# Altium PCB 260115710xxxx-HW-2.0.PcbDoc
Units mm, origin at the board's own origin, x right, y up, seen from the top; angles counter-clockwise.
Board outline 80 x 22.86 mm, 2 copper layers (Top Layer, Bottom Layer), stack 1.57 mm thick; 22 components, 36 nets, 93 pads, 73 vias.
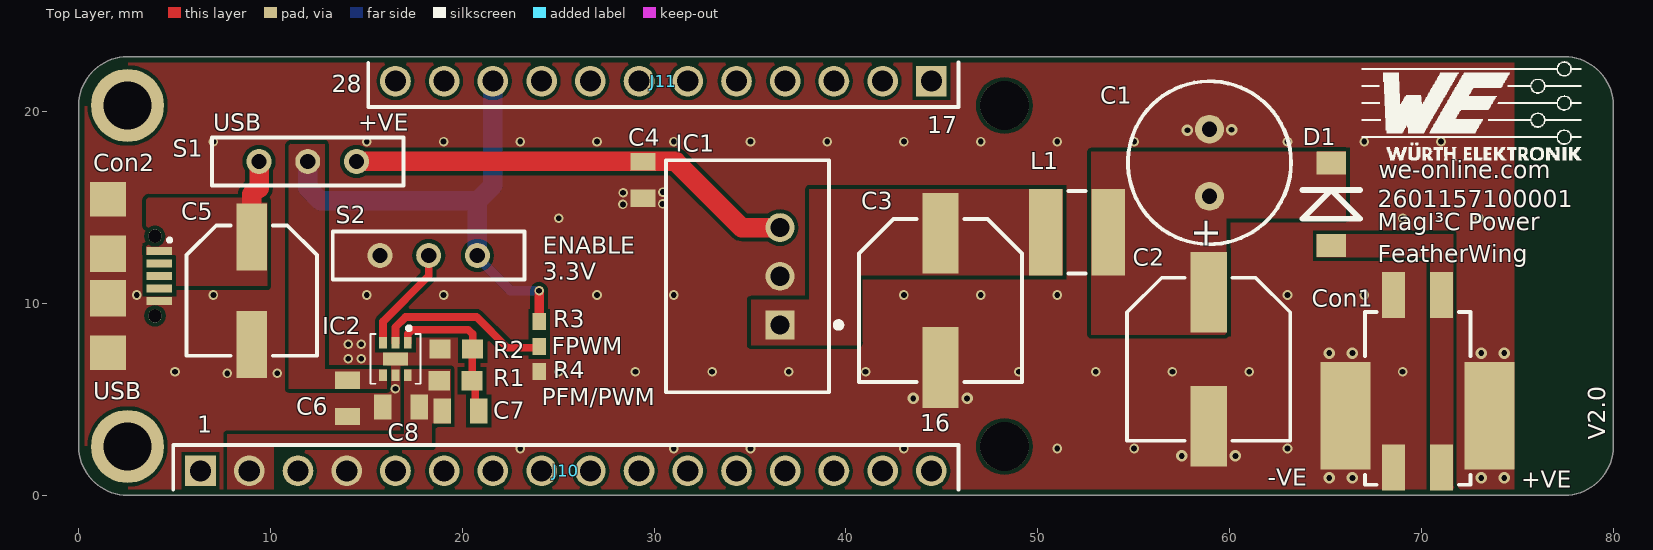
[diagram p0: Top Layer view]
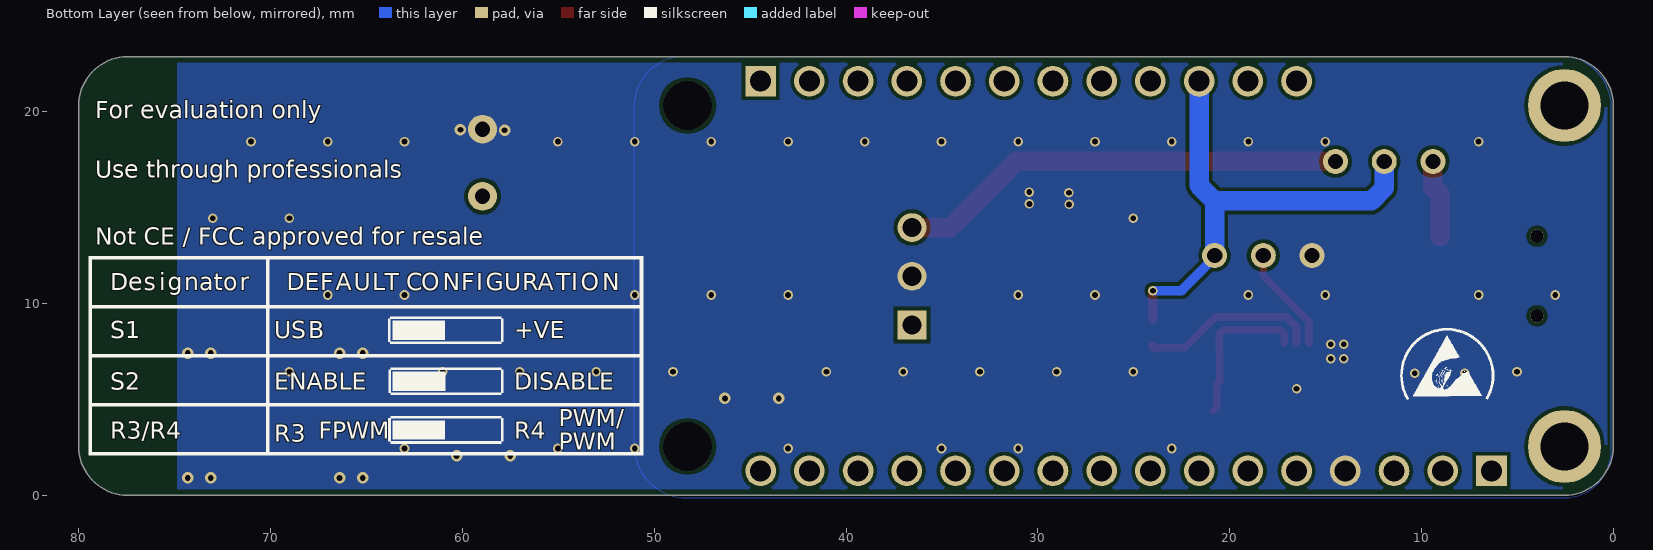
[diagram p1: Bottom Layer view, seen from below]
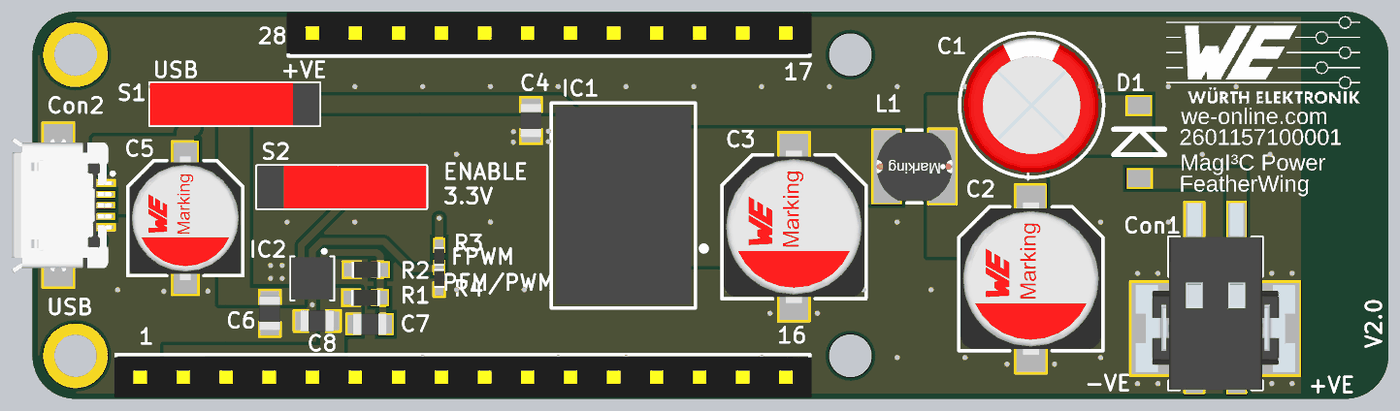
[diagram p2: 3D render of the assembled board from above, using the file's embedded part models]

## Layer stack, top to bottom
Top Solder: solder mask 0.0102, Solder Resist, Dk 3.5
Top Layer: signal copper 0.035
Dielectric 1: dielectric 1.5, FR-4, Dk 4.8
Bottom Layer: signal copper 0.035
Bottom Solder: solder mask 0.0102, Solder Resist, Dk 3.5

## Board outline
2.54,0 cw(c2.54,2.54) 0,2.54 0,20.32 cw(c2.54,20.32) 2.54,22.86 77.46,22.86 cw(c77.46,20.32) 80,20.32 80,2.54 cw(c77.46,2.54) 77.46,0

## Design rules (kind name [scope] priority, off if disabled: settings)
BoardOutlineClearance Exception_J1 [HasFootprint('691502710002')] p1: gap=0 ignorepadtopadclearanceinfootprint=FALSE
BoardOutlineClearance [All] p2: gap=0.3 ignorepadtopadclearanceinfootprint=FALSE
Clearance [All] p1: gap=0.2 ignorepadtopadclearanceinfootprint=FALSE
ComponentClearance [All] p1: gap=0 collisioncheckmode=3 verticalgap=0 showdistances=FALSE
HoleSize [All] p1: absolutevalues=TRUE maxlimit=5 minlimit=0.2 maxpercent=80.000 minpercent=20.000
MinimumAnnularRing [All] p1: minimumring=0.1
MinimumSolderMaskSliver [All] p1: minsoldermaskwidth=0.1
PasteMaskExpansion [All] p1: expansion=-0.1
PolygonConnect [All] p1: connectstyle=Direct reliefconductorwidth=0.254 reliefentries=4 polygonreliefangle="90 Angle" airgapwidth=0.254
RoutingVias [All] p1: holewidth=0.3 width=0.5 viastyle="Through Hole" minholewidth=0.3 minwidth=0.5 maxholewidth=2 maxwidth=2.5
SilkToSilkClearance [All] p1: silktosilkclearance=0.01
SilkToSolderMaskClearance [IsPad] p1: minsilkscreentomaskgap=0.1 clearancetoexposedcopper=TRUE
SolderMaskExpansion [All] p1: expansion=0.051
Width [All] p1: maxlimit=2 minlimit=0.254 preferedwidth=0.254
24 further rules are at their usual default settings.

## Components (designator, comment, footprint, x,y, rotation, side; value= is the part's Value field where it differs from the comment)
C1 "100uF, 50V" WCAP-ATG8_8x11.5 58.951,17.335 r270 top
C2 "10uF, 63V" WCAP-PSHP_8x8.7mm 58.908,7.087 r90 top
C3 "10uF, 63V" WCAP-PSHP_8x8.7mm 44.927,10.158 r90 top
C4 "22uF, 10V" WCAP-CSGP_0805_H=1.25mm 29.414,16.432 r270 top
C5 "220uF, 10V" WCAP-PSLP_6.3x5.8 9.017,10.668 r90 top
C6 "4.7uF, 25V" WCAP-CSGP_0805_H=1.25mm 14,5.05 r270 top
C7 "22pF, 10V" WCAP-CSGP_0805_H=0.6mm_Reflow 19.9,4.4 r180 top
C8 "10uF, 16V" WCAP-CSGP_0805_H=1.25mm 16.8,4.6 r180 top
Con1 "691805010302" 691805010302 69.8,5.048 r0 top
Con2 "WE-Communication Connectors" 629105136821 1.524,10.28 r270 top
D1 "STPS2L30" "SMA Flat" 65.295,15.169 r90 top
IC1 "8-42Vin, 5Vout, 1Aout" 173010x35 34.859,11.416 r90 top
IC2 "2.5-5.5Vin, 1.2Aout" 171010550 16.51,7.112 r270 top
J10 "61301611121" 61301611121 25.4,1.27 r0 top
J11 "61301211121" 61301211121 30.48,21.59 r180 top
L1 "1 uH, 4 A" WE-PD2_4532 52.039,13.714 r270 top
R1 "100k" "SMD Resistor 0603 IPC" 19.646,5.969 r180 top value=100K
R2 "32K4" "SMD Resistor 0603 IPC" 19.685,7.62 r0 top
R3 "0R" "SMD Resistor 0402 IPC" 24,8.408 r270 top
R4 "0R n.p." "SMD Resistor 0402 IPC" 24,7.106 r90 top
S1 "450301014042" 450301014042 11.938,17.4 r0 top
S2 "450301014042" 450301014042 18.243,12.5 r180 top

## Footprints (in the part's own frame and the unit in brackets; to place one, negate y for a bottom-side part, rotate by r counter-clockwise, add the part's x,y. Pads: shape width x height; smd on the part's side, far side on the other; paste and mask are expansions set on the pad)
173010x35 [mm] "Fixed Step Down Regulator Module, SIP-3, body 11.6x8mm"
  rect 1.5x1.5 hole 1: 1(-2.54,-1.7)
  round 1.5 hole 1: 2(0,-1.7) 3(2.54,-1.7)
  silkscreen extent -6.05,-4.9 6.05,4.25, body extent -5.8,-4 5.8,4, height 10.45
171010550 [mm] "Variable Step Down MicroModule, body 2.5x2.5mm"
  rect 0.6x0.4 smd: 1(-0.85,0.65) 2(-0.85,0) 3(-0.85,-0.65) 4(0.85,-0.65) 5(0.85,0) 6(0.85,0.65)
  rect 0.68x1.3 smd: EP(0,0)
  silkscreen extent -1.7,-1.3 1.3,1.3, body extent -1.25,-1.25 1.25,1.25, height 1.21
61301211121 [mm] "Pin Header, pitch 2.54 mm, THT, Vertical, single row, 12p"
  rect 1.6x1.6 hole 1.1: 1(-13.97,0)
  round 1.6 hole 1.1: 2(-11.43,0) 3(-8.89,0) 4(-6.35,0) 5(-3.81,0) 6(-1.27,0) 7(1.27,0) 8(3.81,0) 9(6.35,0) 10(8.89,0) 11(11.43,0) 12(13.97,0)
  silkscreen extent -15.39,-0.96 15.39,1.35, body extent -15.49,-1.21 15.49,1.21, height 8.51
61301611121 [mm] "Pin Header, pitch 2.54 mm, THT, Vertical, single row, 16p"
  rect 1.6x1.6 hole 1.1: 1(-19.05,0)
  round 1.6 hole 1.1: 2(-16.51,0) 3(-13.97,0) 4(-11.43,0) 5(-8.89,0) 6(-6.35,0) 7(-3.81,0) 8(-1.27,0) 9(1.27,0) 10(3.81,0) 11(6.35,0) 12(8.89,0) 13(11.43,0) 14(13.97,0) 15(16.51,0) 16(19.05,0)
  silkscreen extent -20.47,-0.97 20.47,1.35, body extent -20.57,-1.21 20.57,1.21, height 8.51
450301014042 [mm] "THT Mini Slide Switch, body 10x2.5mm"
  round 1.3 hole 0.8: 1(0,0) 2(-2.54,0) 3(2.54,0)
  silkscreen extent -5,-1.25 5,1.25, body extent -5,-1.25 5,1.25, height 6.43
629105136821 [mm] "5 pins"
  rect 0.4x1.35 smd paste-0.1: 1(-2.45,2.675)
  rect 0.4x1.35 smd: 2(-1.8,2.675) 3(-1.15,2.675) 4(-0.5,2.675) 5(0.15,2.675)
  rect 1.8x1.9 smd: Z1(-5.15,0) Z4(2.85,0)
  rect 1.9x1.9 smd: Z2(-2.3,0) Z3(0,0)
  round 0.7 hole 0.7 unplated: ""(-3.225,2.45) ""(0.925,2.45)
  silkscreen extent -3.08,3.16 -2.96,3.27, body extent -5.15,-2.76 2.85,3.15, height 2.69
691805010302 [mm] "2.50mm Screwless SMT, 2p"
  rect 1.2x2.4 smd: 1(-1.25,-3.6) 1(-1.25,5.4) 2(1.25,-3.6) 2(1.25,5.4)
  rect 2.6x5.6 smd: M1(-3.75,-0.9) M2(3.75,-0.9)
  silkscreen extent -2.75,-4.5 2.75,4.5, body extent -4.7,-4.5 4.7,6.5, height 5.1
"SMA Flat" [mm]
  rect 1.2x1.52 smd: 1(-2.16,0) 2(2.16,0)
  silkscreen extent -0.75,-1.5 0.75,1.5, body extent -2.5,-1.5 2.5,1.5, height 1.1
"SMD Resistor 0402 IPC" [mm] "IPC 782 Resistor Footprint 0402"
  rect 0.9x0.7 smd: 1(-0.65,0) 2(0.65,0)
  body extent -0.55,-0.3 0.55,0.3, height 0.4
"SMD Resistor 0603 IPC" [mm] "IPC 782 Resistor Footprint 0603"
  rect 1.1x1 smd: 1(-0.85,0) 2(0.85,0)
  body extent -0.85,-0.48 0.85,0.48, height 0.6
WCAP-ATG8_8x11.5 [mm] "Aluminum Electrolytic Capacitors, 8x11.5mm"
  round 1.5 hole 0.8: 1(-1.75,0) 2(1.75,0)
  silkscreen extent -4.25,-4.25 4.25,4.25, body extent -3.99,-4 4,4, height 11.81
WCAP-CSGP_0805_H=0.6mm_Reflow [mm] "Ceramic Capacitors, body 2x1.25mm"
  rect 0.9x1.3 smd: 1(-0.95,0) 2(0.95,0)
  body extent -1,-0.62 1,0.63, height 0.6
WCAP-CSGP_0805_H=1.25mm [mm] "Ceramic Capacitors, body 2x1.25mm"
  rect 0.9x1.3 smd: 1(-0.95,0) 2(0.95,0)
  body extent -1,-0.62 1,0.63, height 1.25
WCAP-PSHP_8x8.7mm [mm] "Aluminium Polymer V-Chip SMT Capacitors, D8mm x L8.7mm"
  rect 4.2x1.9 smd: 1(-3.5,0) 2(3.5,0)
  silkscreen extent -4.25,-4.25 4.25,4.25, body extent -4.5,-4.15 4.5,4.15, height 8.7
WCAP-PSLP_6.3x5.8 [mm] "Aluminum Polymer Capacitors, body diameter 6.3mm"
  rect 3.5x1.6 smd: 1(-2.8,0) 2(2.8,0)
  silkscreen extent -3.4,-3.4 3.4,3.4, body extent -3.65,-3.3 3.65,3.3, height 5.8
WE-PD2_4532 [mm] "SMD Power Inductor, 2-Leads, body 4x4.5mm"
  rect 4.5x1.75 smd: 1(0,1.625) 2(0,-1.625)
  silkscreen extent -2.15,-0.45 2.15,0.45, body extent -2,-2.25 2,2.25, height 3.2

## Part data
C1: library part 860010674014, "WCAP-ATG8 THT Aluminum Electrolytic Capacitors, D8mm x L11.5mm, 100uF, +/-20%, 50VDC", Capacitance=100uF, Capacitance Tolerance=+/-20%, Leakage Current=50uA, Operating Temperature="-40 to +85degC", Rated Voltage=50VDC, Ripple Current max.=286mA, ComponentLink1Description=Manufacturer, ComponentLink1URL=http://www.we-online.de, ComponentLink2Description=Datasheet, ComponentLink2URL=https://katalog.we-online.com/pbs/datasheet/860010674014.pdf, Diameter=8mm, Dissipation Factor=10%, Endurance=2000h, Length=11.5mm, Mounting Technology=THT, Packaging="Ammo Pack", Part Number=860010674014, Published Date="August 2019", Publisher="Wurth Elektronik", Technical Reference=ATBE115101M050DSPA7B000
C2 C3: library part 875115852001, "WCAP-PSHP Aluminum Polymer Capacitors, size 8x8.7mm, 10uF, +/-20%, 63VDC", Capacitance=10uF, Capacitance Tolerance=+/-20%, Leakage Current=126uA, Operating Temperature="-55 to +105degC", Rated Voltage=63VDC, Ripple Current=1.5A, ComponentLink1Description=Manufacturer, ComponentLink1URL=http://www.we-online.de, ComponentLink2Description=Datasheet, ComponentLink2URL=https://katalog.we-online.com/pbs/datasheet/875115852001.pdf, Diameter=8mm, Dissipation Factor=12%, ESR=45mOhm, Height=8.7mm, Mounting Technology=SMD, Packaging="Tape and Reel", Part Number=875115852001, Published Date="August 2019", Publisher="Wurth Elektronik", Size=8x8.7mm, Technical Reference=PSEE087100M063DVCTEB000
C4: library part 885012107011, "WCAP-CSGP General Purpose Ceramic Capacitors, size 0805, 22uF, +/-20%, 10VDC", Capacitance=22uF, Capacitance Tolerance=+/-20%, Isolation Resistance=>=0.005GOhm, Operating Temperature="-55 to +85degC", Rated Voltage=10VDC, Ceramic Type=X5R, ComponentLink1Description=Manufacturer, ComponentLink1URL=http://www.we-online.de, ComponentLink2Description=Datasheet, ComponentLink2URL=https://katalog.we-online.com/pbs/datasheet/885012107011.pdf, Dissipation Factor=#NAME?, Height="1.25mm +0.20/-0.00mm", Mounting Technology=SMT, Packaging="Tape and Reel", Part Number=885012107011, Published Date="August 2019", Publisher="Wurth Elektronik", Size=0805, Technical Reference=X5R0805226M010DFCT10000
C5: library part 875105244013, "WCAP-PSLP Aluminum Polymer Capacitors, D6.3mm, L5.8mm, 220uF, +/-20%, 10VDC", Capacitance=220uF, Capacitance Tolerance=+/-20%, Leakage Current=300uA, Operating Temperature="-55 to +105degC", Rated Voltage=10VDC, Ripple Current max.=1970mA, ComponentLink1Description=Manufacturer, ComponentLink1URL=http://www.we-online.de, ComponentLink2Description=Datasheet, ComponentLink2URL=https://katalog.we-online.com/pbs/datasheet/875105244013.pdf, Diameter=6.3mm, Dissipation Factor=8%, Endurance=2000h, ESR=30mOhm, Length=5.8mm, Mounting Technology=SMD, Packaging="Tape and Reel", Part Number=875105244013, Published Date="August 2019", Publisher="Wurth Elektronik", Technical Reference=PSED058221M010DVCTBB000
C6: library part 885012107018, "WCAP-CSGP General Purpose Ceramic Capacitors, size 0805, 4.7uF, +/-20%, 25VDC", Capacitance=4.7uF, Capacitance Tolerance=+/-20%, Isolation Resistance=>=0.02GOhm, Operating Temperature="-55 to +85degC", Rated Voltage=25VDC, Ceramic Type=X5R, ComponentLink1Description=Manufacturer, ComponentLink1URL=http://www.we-online.de, ComponentLink2Description=Datasheet, ComponentLink2URL=https://katalog.we-online.com/pbs/datasheet/885012107018.pdf, Dissipation Factor=#NAME?, Height="1.25mm +/-0.20mm", Mounting Technology=SMT, Packaging="Tape and Reel", Part Number=885012107018, Published Date="August 2019", Publisher="Wurth Elektronik", Size=0805, Technical Reference=X5R0805475M025DFCT10000
C7: library part 885012007002, "WCAP-CSGP General Purpose Ceramic Capacitors, size 0805, 22pF, +/-5%, 10VDC", Capacitance=22pF, Capacitance Tolerance=+/-5%, Isolation Resistance=>=10GOhm, Operating Temperature="-55 to +125degC", Rated Voltage=10VDC, Ceramic Type=NP0, ComponentLink1Description=Manufacturer, ComponentLink1URL=http://www.we-online.de, ComponentLink2Description=Datasheet, ComponentLink2URL=https://katalog.we-online.com/pbs/datasheet/885012007002.pdf, Dissipation Factor=Q>=400+20C, Height="0.6mm +/-0.10mm", Mounting Technology=SMT, Packaging="Tape and Reel", Part Number=885012007002, Published Date="August 2019", Publisher="Wurth Elektronik", Size=0805, Technical Reference=NP00805220J010DFCT10000
C8: library part 885012107014, "WCAP-CSGP General Purpose Ceramic Capacitors, size 0805, 10uF, +/-20%, 16VDC", Capacitance=10uF, Capacitance Tolerance=+/-20%, Isolation Resistance=>=0.005GOhm, Operating Temperature="-55 to +85degC", Rated Voltage=16VDC, Ceramic Type=X5R, ComponentLink1Description=Manufacturer, ComponentLink1URL=http://www.we-online.de, ComponentLink2Description=Datasheet, ComponentLink2URL=https://katalog.we-online.com/pbs/datasheet/885012107014.pdf, Dissipation Factor=#NAME?, Height="1.25mm +/-0.20mm", Mounting Technology=SMT, Packaging="Tape and Reel", Part Number=885012107014, Published Date="August 2019", Publisher="Wurth Elektronik", Size=0805, Technical Reference=X5R0805106M016DFCT10000
Con1: "WR-TBL Serie 8050 Horizontal Entry SMT, Screwless, pitch 2.5mm, 2p", Operating Temperature="-45 to +130degC", Rated Current [UL]=6A, Working Voltage [UL]=300VAC, Application=Screwless, Compliance="Lead free / RoHS", ComponentLink1Description=Manufacturer, ComponentLink1URL=http://www.we-online.de, ComponentLink2Description=Datasheet, ComponentLink2URL=https://katalog.we-online.de/em/datasheet/691805010302.pdf, Modularity=No, Mounting Technology=SMT, Packaging="Tape and Reel", Part Number=691805010302, PCB/Cable/Panel=PCB, Pin Number=2, Pitch=2.5mm, Published Date="October 2019", Publisher="Wurth Elektronik", Type=Horizontal
Con2: library part "WE-Communication Connectors 629105136821", "WR-COM Micro USB SMT Type B", Manufacturer="Würth Elektronik eiSos GmbH", Part Number=629105136821, ComponentLink1 Description=Manufacturer, ComponentLink1URL=http://www.we-online.de, ComponentLink2 Description=Datasheet, ComponentLink2URL=http://katalog.we-online.de/em/datasheet/629105136821.pdf, Created by="Karrer Zheng", Created Date=10/10/2014, NoPins=5
D1: "Single chip Schottky rectifiers STPS2L30, size SMA Flat, If 1 A, Vrrm 30 V, Vf 0.325 V", Forward current="1 A", Forward voltage drop="0.325 V", Maximum operating junction temperature="+150 degC", Repetitive peak reverse voltage="30 V", Reverse leakage current="200 uA", Storage temperature range="-65 to +150 degC", Mounting Technology=SMT, Packaging="Tape and ree", Part Number=STPS2L30, Publisher=STMicroelectronics
IC1: library part 173010535, "MagI3C-FDSM Fixed Step Down Regulator Module, SIP-3, 8-36Vin, 5Vout, 1Aout", Input Voltage=8-42V, Operating Temperature="-40 to +85degC", Output Current=1A, Output Voltage=5V, Part Number=173010542, ComponentLink1Description=Manufacturer, ComponentLink1URL=http://www.we-online.de, ComponentLink2Description=Datasheet, ComponentLink2URL=https://www.we-online.com/catalog/datasheet/173010542.pdf, Height=10.5mm, Length=11.6mm, Mounting Technology=THT, Packaging=Tube, Published Date="March 2020", Publisher="Wurth Elektronik", Size=SIP-3, Width=8.5mm
IC2: library part 171010550, "MagI3C-VDMM Variable Step Down MicroModule, LGA-6EP, 2.5-5.5Vin, 1.2Aout", Input Voltage=2.5-5.5V, Operating Temperature="-40 to +125degC", Output Current=1.2A, Output Voltage=0.8-5.5V, ComponentLink1Description=Manufacturer, ComponentLink1URL=http://www.we-online.de, ComponentLink2Description=Datasheet, ComponentLink2URL=https://katalog.we-online.de/pm/datasheet/171010550.pdf, Height=1.2mm, Length=2.5mm, Mounting Technology=SMT, Packaging="Tape and Reel", Part Number=171010550, Published Date="October 2019", Publisher="Wurth Elektronik", Size=LGA-6EP, Width=2.5mm
J10: "THT Vertical Pin Header WR-PHD, Pitch 2.54 mm, Single Row, 16 pins", Contact Resistance="20 mOhm", Operating Temperature="-40 to 105 degC", Rated Current="3 A", Withstanding Voltage="500 VAC", Working Voltage="250 VAC", ComponentLink1Description=Manufacturer, ComponentLink1URL=http://www.we-online.de, ComponentLink2Description=Datasheet, ComponentLink2URL=https://katalog.we-online.de/em/datasheet/6130xx11121.pdf, Gender=Male, Mounting Technology=THT, Orientation=Vertical, Packaging=Bag, Part Number=61301611121, Pin Number=16, Pitch="2.54 mm", Published Date="August 2018", Publisher="Wurth Elektronik", Row Number=Single
J11: "THT Vertical Pin Header WR-PHD, Pitch 2.54 mm, Single Row, 12 pins", Contact Resistance="20 mOhm", Operating Temperature="-40 to 105 degC", Rated Current="3 A", Withstanding Voltage="500 VAC", Working Voltage="250 VAC", ComponentLink1Description=Manufacturer, ComponentLink1URL=http://www.we-online.de, ComponentLink2Description=Datasheet, ComponentLink2URL=https://katalog.we-online.de/em/datasheet/6130xx11121.pdf, Gender=Male, Mounting Technology=THT, Orientation=Vertical, Packaging=Bag, Part Number=61301211121, Pin Number=12, Pitch="2.54 mm", Published Date="August 2018", Publisher="Wurth Elektronik", Row Number=Single
L1: library part 7447730, "SMT Power Inductor WE-PD2, size 4532, 1 uH, 4 A", DC Resistance max.="0.049 Ohm", Inductance="1 uH", Operating Temperature="-40 to +125 degC", Rated Current="4 A", Saturation Current="5.72 A", Self Resonant Frequency="110 MHz", ComponentLink1Description=Manufacturer, ComponentLink1URL=http://www.we-online.de, ComponentLink2Description=Datasheet, ComponentLink2URL=https://katalog.we-online.com/pbs/datasheet/7447730.pdf, Mounting Technology=SMT, Packaging="Tape and Reel", Part Number=7447730, Published Date="December 2018", Publisher="Wurth Elektronik", Size=4532
R1: library part SMD_Resistor, "SMD Resistor /100k / 0603/ 1%", Package Description="Chip Resistor", Latest Revision Date=2018.10.31, Latest Revision Note=Created, Mounting Style=SMD, Published=2018.10.31, Publisher="Würth Elektronik"
R2: library part SMD_Resistor, "SMD Resistor / 32k4 / 0603 / 1%", Package Description="Chip Resistor", Latest Revision Date=2018.10.31, Latest Revision Note=Created, Mounting Style=SMD, Published=2018.10.31, Publisher="Würth Elektronik"
R3 R4: library part SMD_Resistor, "SMD Resistor / 0R / 0402 / 1%", Package Description="Chip Resistor", Latest Revision Date=2018.10.31, Latest Revision Note=Created, Mounting Style=SMD, Published=2018.10.31, Publisher="Würth Elektronik"
S1 S2: "WS-SLTV THT Mini Slide Switch, Opposite Side Connection, SPDT", Operating Temperature="-40 to +85degC", Rated Current=500mA, Rated Voltage=12VDC, Circuit=SPDT, ComponentLink1Description=Manufacturer, ComponentLink1URL=http://www.we-online.de, ComponentLink2Description=Datasheet, ComponentLink2URL=https://katalog.we-online.com/em/datasheet/450301014042.pdf, Contact Material="Copper Alloy", Contact Plating=Gold, Mounting Technology=THT, Packaging=Bulk, Part Number=450301014042, Published Date="September 2019", Publisher="Wurth Elektronik", Size=10x2.5mm, Switching Function=On-On, Terminal Material="Copper Alloy", Terminal Plating=Gold

## Free pads (board coordinates)
  round 3.81 / inner round 1.524 / far side round 3.81 hole 2.5: NC(2.54,2.54) NC(2.54,20.32)
  round 2.54 hole 2.54 unplated: NC(48.26,2.54) NC(48.26,20.32)

## Via types
v1: diameter 0.5, hole 0.3, Top Layer to Bottom Layer, tented both sides, 59 vias
v2: diameter 0.6, hole 0.3, Top Layer to Bottom Layer, tented both sides, 14 vias

## Nets (pads, with @x,y where several pads share a name; then routed paths per layer and width w, separated by ;. In a path a pad name is that pad's centre, name@x,y a point inside that pad or via, vN(x,y) a via of type N, cw(c..) or ccw(c..) an arc to the next point about the centre after c; other vN are vias at no path point)
+3V3: C7.2 C8.1 IC2.6 J10.2 R1.2
+24V: Con1.2 D1.1
/Reset: J10.1
AREF: J10.3
D1_OUT: C1.2 C2.2 D1.2 L1.1
EN: J11.11
EN_VDMM: IC2.3 S2.1 | length 5.5
  Top Layer w0.254: S2.1@18.243,12.443 S2.1
  Top Layer w0.4: IC2.3 15.86,9.055 18.243,11.438 S2.1@18.243,12.443
FB_VDMM: C7.1 IC2.1 R1.1 R2.2 | length 8.2
  Top Layer w0.4: IC2.1 17.16,8.402 17.394,8.636 20.301,8.636 20.535,8.402 R2.2 20.515,7.601 20.515,5.988 R1.1 20.673,5.792 20.673,4.577 C7.1
GND: C1.1 C2.1 C3.1 C4.2 C5.1 C6.2 C8.2 Con1.1 Con1.M1 Con1.M2 Con2.5 Con2.Z1 Con2.Z2 Con2.Z3 Con2.Z4 IC1.2 IC2.5 IC2.EP J10.4 R2.1 R4.1 S2.3
  other v1: 23.02,2.437 31.02,2.437 35.02,2.437 43.02,2.437 51.02,2.437 55.02,2.437 63.02,2.437 16.51,5.55 7.747,6.35 10.354,6.354 5.02,6.437 25.02,6.437 29.02,6.437 33.02,6.437 37.02,6.437 41.02,6.437 49.02,6.437 53.02,6.437 57.02,6.437 61.02,6.437 69.02,6.437 14.05,7.112 14.732,7.112 14.05,7.874 14.732,7.874 3.02,10.437 7.02,10.437 15.02,10.437 19.02,10.437 27.02,10.437 31.02,10.437 43.02,10.437 47.02,10.437 51.02,10.437 63.02,10.437 67.02,10.437 25.02,14.437 69.02,14.437 73.02,14.437 28.369,15.16 30.436,15.189 28.376,15.774 30.443,15.803 7.02,18.437 15.02,18.437 19.02,18.437 23.02,18.437 27.02,18.437 31.02,18.437 35.02,18.437 39.02,18.437 43.02,18.437 47.02,18.437 51.02,18.437 55.02,18.437 63.02,18.437 67.02,18.437 71.02,18.437
  other v2: 65.2,0.9 66.4,0.9 73.122,0.9 74.322,0.9 57.503,2.05 60.303,2.05 43.512,5.05 46.312,5.05 65.2,7.409 66.4,7.409 73.122,7.409 74.322,7.409 57.8,19.033 60.1,19.059
GPIO9: J11.5
GPIO10: J11.6
GPIO11: J11.7
GPIO12: J11.8
GPIO13: J11.9
GPIOA0: J10.5
GPIOA1: J10.6
GPIOA2: J10.7
GPIOA3: J10.8
GPIOA4: J10.9
GPIOA5: J10.10
I2C_SCL: J11.2
I2C_SDA: J11.1
MODE_VDMM: IC2.2 R3.2 R4.2 | length 9.2
  Top Layer w0.4: IC2.2 16.51,8.766 17.038,9.294 20.74,9.294 22.342,7.692 R3.2@23.936,7.692
  Top Layer w0.5: R3.2@23.936,7.692 R3.2
NC: J10.16
SPI_MISO: J10.13
SPI_MOSI: J10.12
SPI_SCK: J10.11
UART1_RX: J11.4
UART1_TX: J11.3
UART5_RX: J10.14
UART5_TX: J10.15
VBAT: J11.12
VCC: C5.2 Con2.1 S1.2 | length 5
  Top Layer w0.5: S1.2@9.319,17.321 S1.2
  Top Layer w1.016: C5.2@9.017,14.418 C5.2 9.015,13.47 9.015,15.696 9.319,16 ; 9.398,16 S1.2@9.398,17.321
VDD: C4.1 IC1.3 S1.3 | length 23.5
  Top Layer w1.016: S1.3 27.225,17.4 31.118,17.4 34.562,13.956 IC1.3
VIN_FDSM: C3.2 IC1.1 L1.2
VIN_VDMM: C6.1 IC2.4 J11.10 R3.1 S1.1 S2.2 | length 25.3
  Top Layer w0.5: R3.1@24,9.165 v1(24,10.665)
  Bottom Layer w0.5: S2.2@20.728,12.445 22.508,10.665 v1@23.841,10.665
  Bottom Layer w1.016: S1.1 11.938,16.019 12.608,15.349 20.783,15.349 ; S2.2 20.783,15.349 ; J11.10 21.59,16.156 20.783,15.349
pads on no net: Con2. Con2.2 Con2.3 Con2.4

## Polygon pours and split planes (outlines as drawn)
GND on Top Layer "Top Layer-GND" (solid, remove dead copper, pour order 52): -0.502,-0.006 74.85,-0.006 74.85,22.853 -0.037,22.853
VCC on Top Layer "Polygon_1_Net_VCC" (solid, remove dead copper, pour order 24): 3.524,15.507 8.599,15.497 8.594,15.238 9.817,15.238 9.817,10.909 5.067,10.909 5.067,12.53 3.524,12.53
D1_OUT on Top Layer "Top Layer-D1_OUT 1" (solid, pour order 50): 52.789,17.914 64.521,17.914 64.535,17.929 66.055,17.929 66.055,14.434 59.818,14.434 59.818,8.528 59.858,8.487 59.75,8.379 52.789,8.379 52.789,16.19
no net on Top Layer "Top Layer-No Net 4" (solid, pour order 48): 52.789,15.964
+24V on Top Layer "Top Layer-D1_OUT" (solid, pour order 12): 64.535,12.409 70.45,12.409 70.45,0.248 71.885,0.248 71.65,0.483 71.65,13.609 64.535,13.609
VIN_VDMM on Top Layer "Top Layer-VIN_VDMM" (solid, pour order 14): 16.06,5.55 10.96,5.55 10.96,18.315 12.822,18.311 12.822,6.818 12.822,6.688 12.822,6.562 16.06,6.562
no net on Top Layer "Top Layer-No Net 3" (solid, pour order 44): 71.858,16.19
+3V3 on Top Layer "Top Layer-+3V3" (solid, remove dead copper, pour order 6): 19.4,3.75 18.415,3.75 18.415,2.54 10.173,2.54 10.173,0.241 7.734,0.241 7.734,3.175 16.96,3.175 16.96,4.826 16.96,6.562 18.804,6.562 19.4,6.562
no net on Top Layer "Top Layer-No Net" (solid, pour order 40): 0,20.828
no net on Top Layer "Top Layer-No Net 1" (solid, pour order 38): 0,2.286
no net on Top Layer "Top Layer-No Net 2" (solid, pour order 36): 48.387,13.208
VIN_FDSM on Top Layer "Polygon_1_Net_N$1" (solid, remove dead copper, pour order 18): 40.651,11.464 40.651,7.961 40.782,7.83 35.051,7.83 35.051,9.733 35.051,10.193 38.092,10.193 38.092,15.964 51.289,15.964 51.289,11.464
GND on Bottom Layer "Bottom Layer-GND" (solid, pour order 31): 48.509,0.006 74.87,0.006 74.87,23.006 48.63,23.006 ccw(c48.502,20.41) 48.373,23.006 0.036,23.006 0.036,12.134 0.036,2.482 ccw(c2.526,2.482) 2.526,-0.007 48.246,-0.007 ccw(c48.246,2.736)
no net on Bottom Layer "Polygon_1_Net_GND" (solid, remove dead copper, pour order 26): 0.102,12.002 0.102,20.256 cw(c2.718,20.256) 2.718,22.873 48.438,22.873 cw(c48.438,20.257) 51.054,20.257 51.054,2.607 cw(c48.311,2.603) 48.311,-0.14 2.591,-0.14 cw(c2.591,2.349) 0.102,2.349

## Silkscreen, mask and mechanical layers (free items; w line width, h text height)
Top Overlay:
  drawing of 27 lines, arcs and shapes, not listed
  text "USB" at 7,19 h0.9
  text "+VE" at 14.565,19 h0.9
  text "we-online.com" at 67.768,16.225 h1.52
  text "2601157100001" at 67.713,14.707 h1.52
  text "MagI³C Power" at 67.713,13.495 h1.52
  text "FeatherWing" at 67.713,11.834 h1.52
  text "ENABLE / 3.3V" at 24.201,11.242 h0.9
  text "FPWM" at 24.65,7.363 h0.9
  text "USB" at 0.75,5 h0.9
  text "PFM/PWM" at 24.148,4.695 h0.9
  text "V2.0" at 79.574,2.905 h0.9 r90
  text "-VE" at 62,0.496 h0.9
  text "+VE" at 75.2,0.389 h0.9
Bottom Overlay:
  drawing of 89 lines, arcs and shapes, not listed
  text "For evaluation only" at 79.15,19.648 h0.9
  text "Use through professionals" at 79.15,16.548 h0.9
  text "Not CE / FCC approved for resale" at 79.15,13.057 h0.9
  text "N" at 52.716,10.694 h0.9
  text "O" at 53.834,10.694 h0.9
  text "I" at 54.313,10.694 h0.9
  text "T" at 55.112,10.694 h0.9
  text "A" at 56.07,10.694 h0.9
  text "R" at 56.869,10.694 h0.9
  text "U" at 57.827,10.694 h0.9
  text "G" at 58.785,10.694 h0.9
  text "I" at 59.265,10.694 h0.9
  text "F" at 60.063,10.694 h0.9
  text "N" at 61.021,10.694 h0.9
  text "O" at 62.139,10.694 h0.9
  text "C" at 62.938,10.694 h0.9
  text "T" at 64.056,10.694 h0.9
  text "L" at 64.695,10.694 h0.9
  text "U" at 65.653,10.694 h0.9
  text "A" at 66.611,10.694 h0.9
  text "F" at 67.41,10.694 h0.9
  text "E" at 68.208,10.694 h0.9
  text "D" at 69.167,10.694 h0.9
  text "r" at 71.607,10.694 h0.9
  text "o" at 72.457,10.694 h0.9
  text "t" at 72.957,10.694 h0.9
  text "a" at 73.707,10.694 h0.9
  text "n" at 74.507,10.694 h0.9
  text "g" at 75.357,10.694 h0.9
  text "i" at 75.807,10.694 h0.9
  text "s" at 76.609,10.694 h0.9
  text "e" at 77.408,10.694 h0.9
  text "D" at 78.366,10.694 h0.9
  text "+VE" at 57.3,8.194 h0.9
  text "B" at 68.034,8.194 h0.9
  text "S" at 68.933,8.194 h0.9
  text "U" at 69.8,8.194 h0.9
  text "1" at 77.566,8.194 h0.9
  text "S" at 78.365,8.194 h0.9
  text "DISABLE" at 57.3,5.494 h0.9
  text "ENABLE" at 69.8,5.494 h0.9
  text "2" at 77.566,5.494 h0.9
  text "S" at 78.365,5.494 h0.9
  text "PWM/" at 54.98,3.6 h0.9
  text "R4" at 57.3,2.944 h0.9
  text "FPWM" at 67.48,2.944 h0.9
  text "R3/R4" at 78.365,2.944 h0.9
  text "R3" at 69.8,2.791 h0.9
  text "PWM" at 54.98,2.38 h0.9
Dimensions:
  lines w0.254: 0,2.54 ccw(c2.54,2.54) 2.54,0 48.26,0 77.46,0 ccw(c77.46,2.54) 80,2.54 80,20.32 ccw(c77.46,20.32) 77.46,22.86 48.26,22.86 2.54,22.86 ccw(c2.54,20.32) 0,20.32 0,2.54

## Text inside footprints (layer, text, board x,y; h text height)
C1: Top Overlay "+" at 58.166,14.529 h1.5 r270
J10: Top Overlay "16" at 43.861,3.328 h0.9; Top Overlay "1" at 6.186,3.256 h0.9
J11: Top Overlay "17" at 44.232,18.878 h0.9; Top Overlay "28" at 13.2,21 h0.9